# Altium PCB NEOS_CAN.PcbDoc
Units mil, origin at the board's own origin, x right, y up, seen from the top; angles counter-clockwise.
Board outline 3250 x 4000 mil, 2 copper layers (Top Layer, Bottom Layer); 41 components, 45 nets, 218 pads, 51 vias.
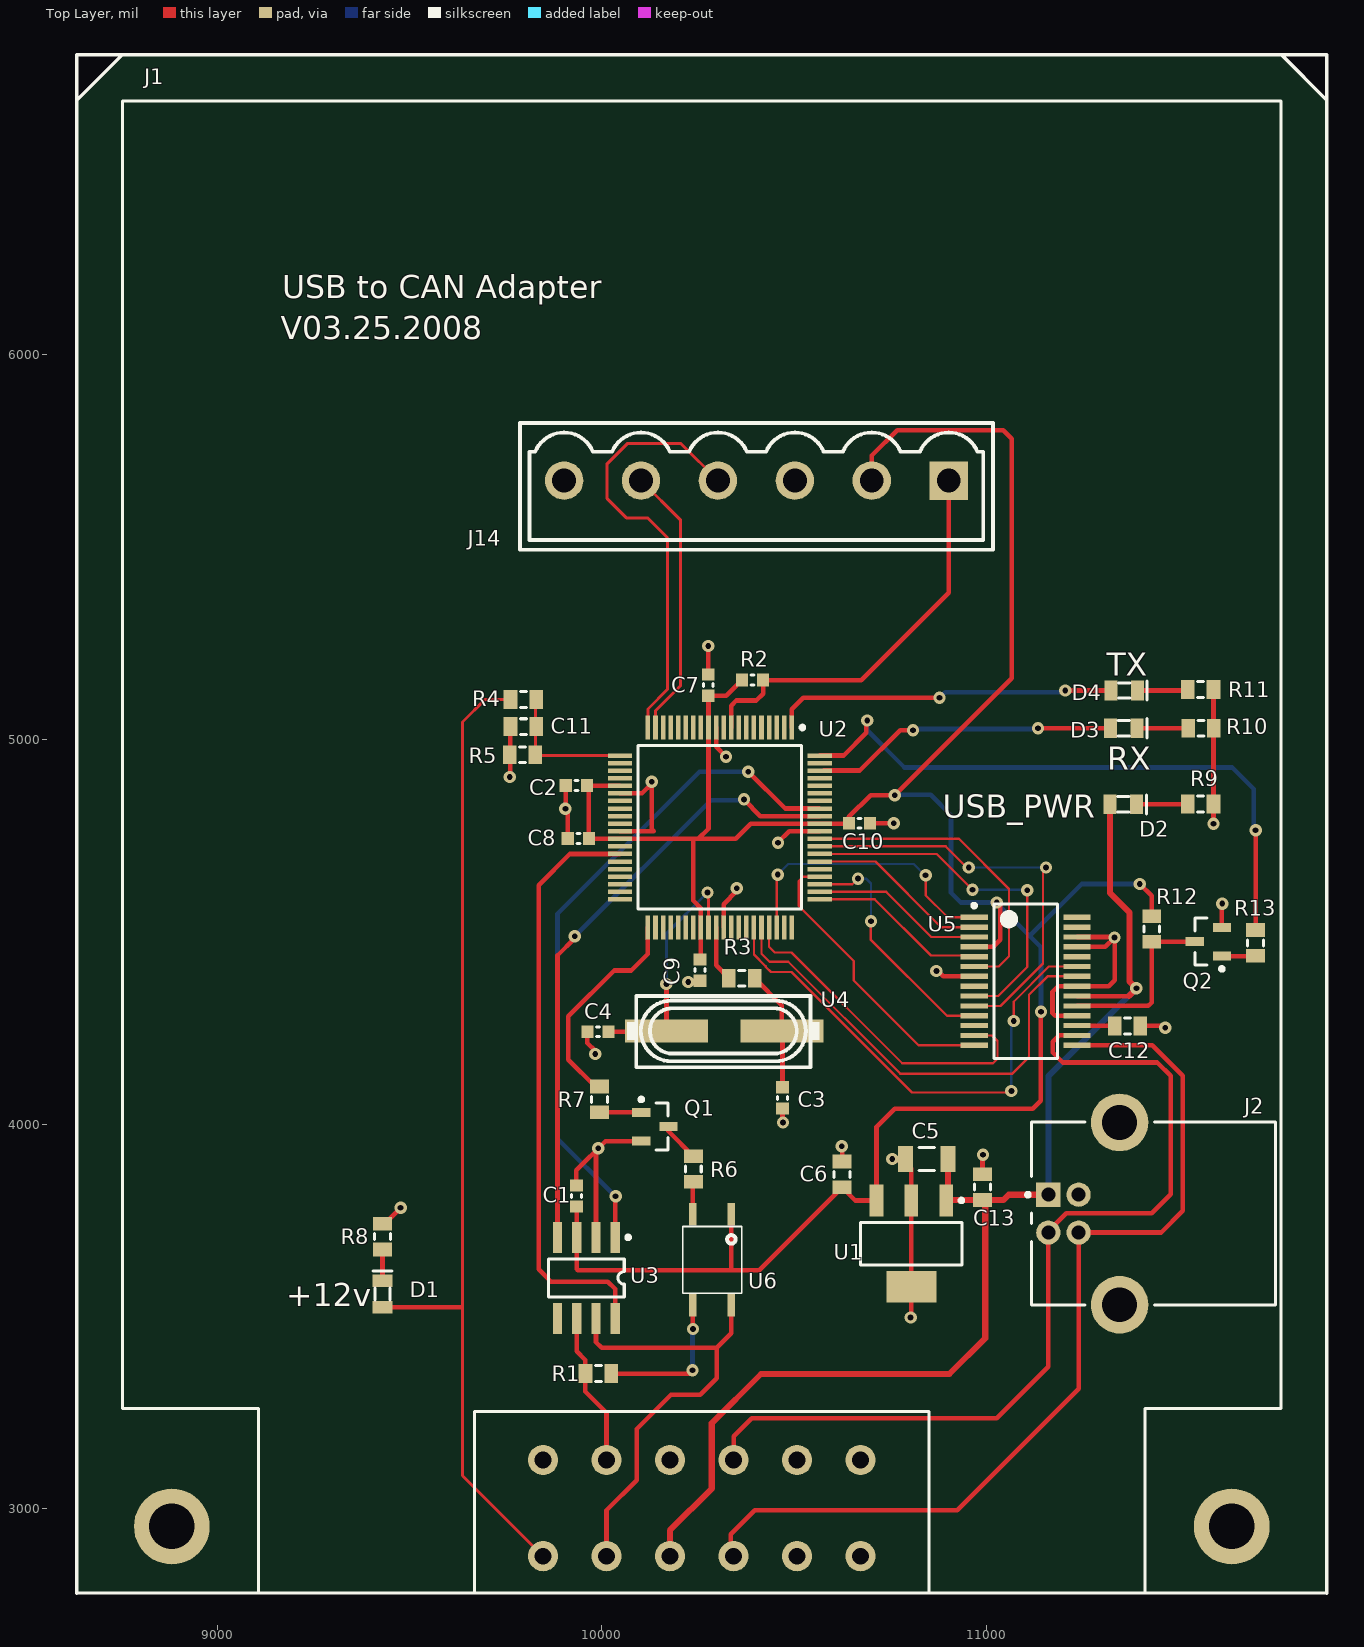
[diagram p0: Top Layer view]
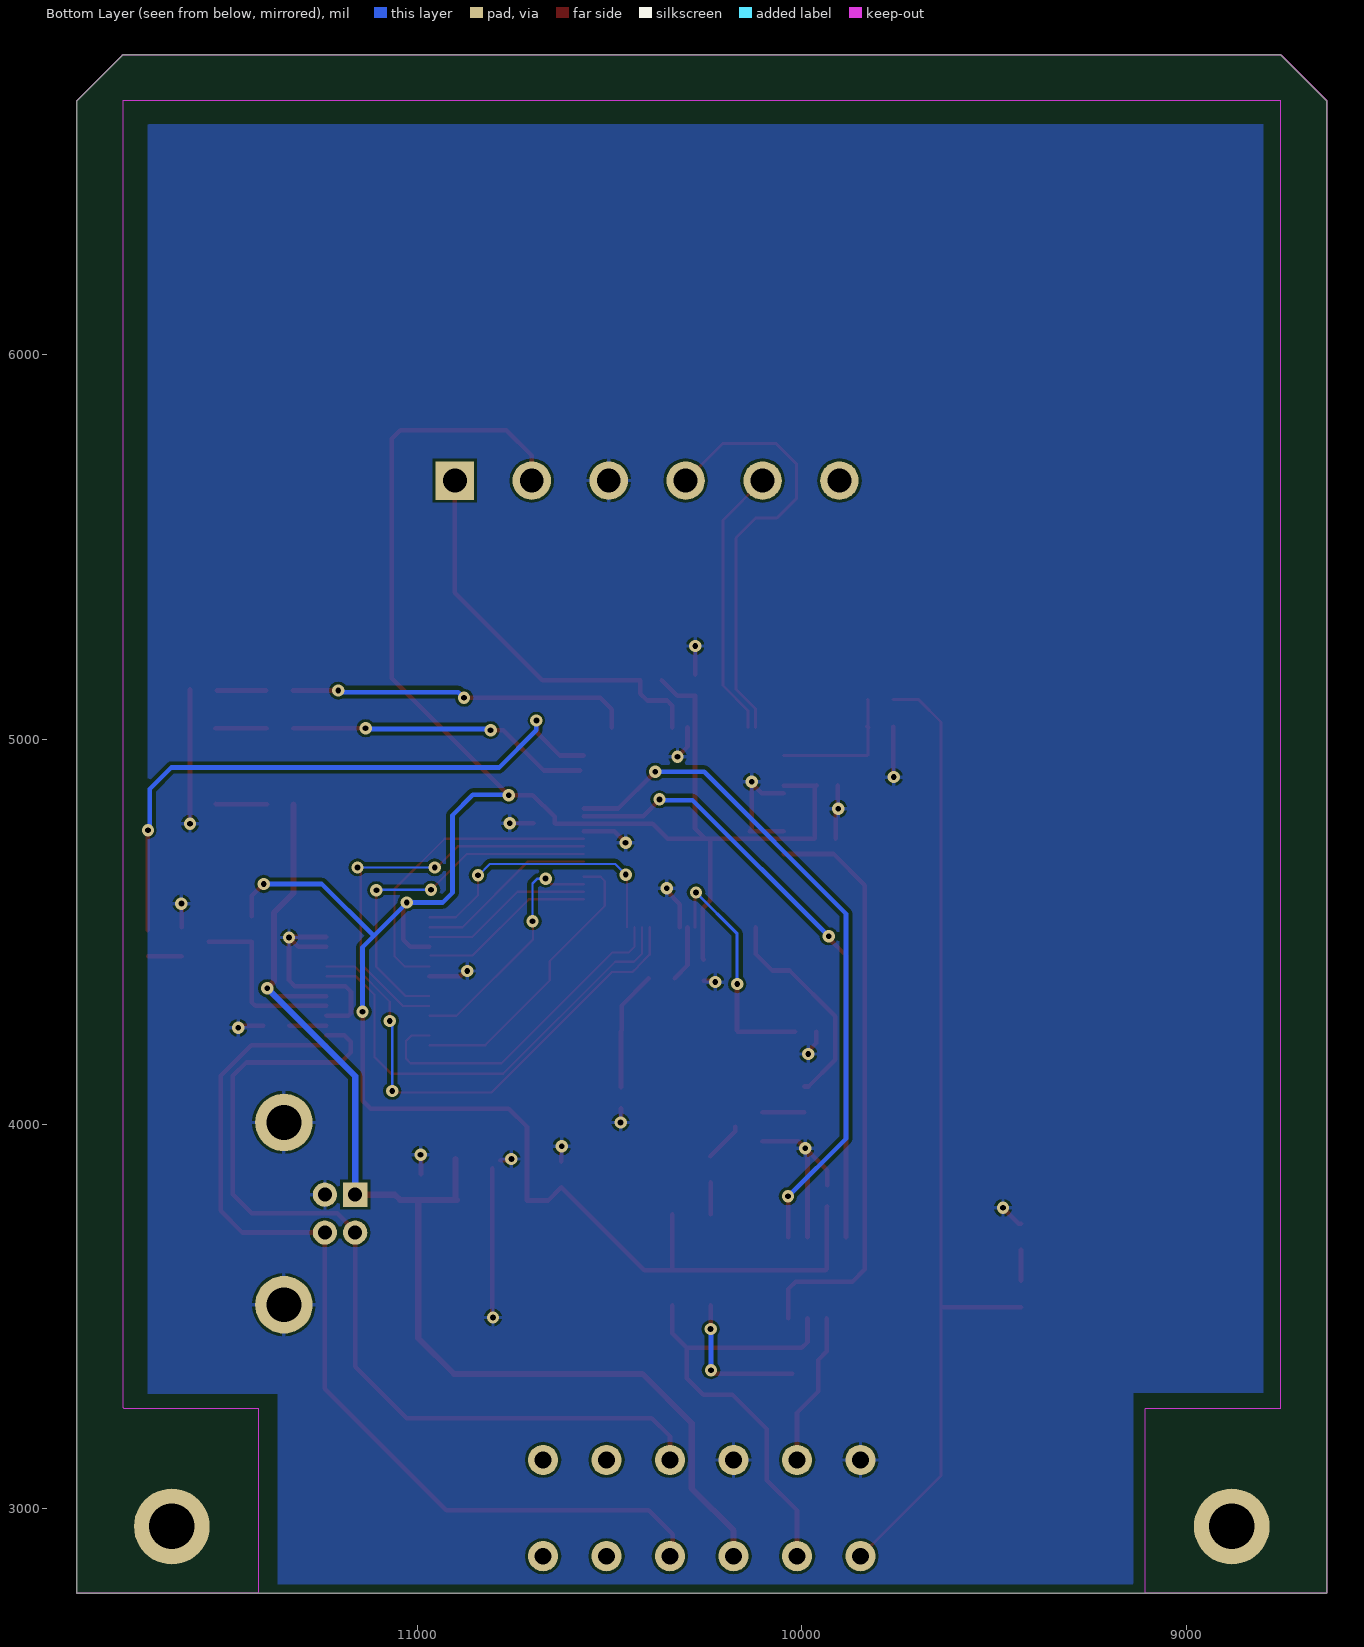
[diagram p1: Bottom Layer view, seen from below]

## Layer stack, top to bottom
Top Layer: signal copper 1.4
Dielectric: dielectric 12.6, FR-4, Dk 4.8
Bottom Layer: signal copper 1.4

## Board outline
8635,2780 8635,6660 8755,6780 11765,6780 11885,6660 11885,2780 8635,2780

## Design rules (kind name [scope] priority, off if disabled: settings)
Clearance Clearance_1 [(OnLayer('Bottom Layer') AND InNet('GND') AND InPolygon) vs (OnLayer('Bottom Layer'))] p1: gap=10
Clearance [All] p2: gap=7
ComponentClearance [All] p1: gap=-5000 collisioncheckmode=0 verticalgap=0
HoleSize [All] p1: absolutevalues=TRUE maxlimit=500 minlimit=1 maxpercent=80.000 minpercent=20.000
PolygonConnect [All] p1: connectstyle=Relief reliefconductorwidth=10 reliefentries=4 polygonreliefangle="90 Angle"
RoutingVias [All] p1: holewidth=15 width=32 viastyle="Through Hole" minholewidth=15 minwidth=32 maxholewidth=15 maxwidth=32
SolderMaskExpansion [All] p1: expansion=4
TestPointUsage [All] p1: valid=0 allowmultiple=FALSE
Testpoint [All] p1: side=15 testpointundercomponent=TRUE minsize=40 maxsize=100 preferedsize=60 minholesize=0 maxholesize=40 preferedholesize=32 testpointgrid=1 style=1023 order=0-112345678
Width POWER [(InNet('+3.3V') OR InNet('USB_VBUS'))] p1: maxlimit=20 minlimit=10 preferedwidth=16 toplayer_minwidth=12 bottomlayer_minwidth=12 minimp=50.000000 maximp=50.000000 favimp=50.000000
Width [All] p2: maxlimit=12 minlimit=6 preferedwidth=7
17 further rules are at their usual default settings.

## Components (designator, comment, footprint, x,y, rotation, side; value= is the part's Value field where it differs from the comment)
C1 "C" 0603 9934,3813 r270 top
C2 "C" 0603 9934,4880 r0 top
C3 "C" 0603 10470,4068 r90 top
C4 "C" 0603 9990,4240 r0 top
C5 "C" 1206 10845,3909 r0 top
C6 "C" 0805 10625,3869 r270 top
C7 "C" 0603 10277,5141 r270 top
C8 "C" 0603 9939,4742 r0 top
C9 "C" 0603 10255,4400 r90 top
C10 "C" 0603 10670,4782 r180 top
C11 "C" 0805 9796,5033 r0 top
C12 "C" 0805 11367,4255 r0 top
C13 "C" 0805 10990,3836 r270 top
D1 "LED_0805" LED_0805 9430,3558 r90 top
D2 "LED_0805" LED_0805 11356,4831 r0 top
D3 "LED_0805" LED_0805 11357,5029 r0 top
D4 "LED_0805" LED_0805 11358,5127 r0 top
J1 "DT13-12PA-R008" DTM13-12PA-R008 10260,2780 r0 top locked
J2 "CONN RCPT USB TYPE B R/A PCB" 1-1470156 11752,3767 r0 top
J14 "CONN HEADER VERT 6POS 5.08MM" JCPM5086VE0Z 10902,5673 r180 top
Q1 "NPN_SOT23" SOT95P245X145-3L 10138,3993 r0 top
Q2 "NPN_SOT23" SOT95P245X145-3L 11577,4474 r180 top
R1 "R" 0805 9991,3351 r180 top
R2 "R" 0603 10392,5154 r0 top
R3 "R" 0805 10364,4379 r0 top
R4 "R" 0805 9796,5104 r180 top
R5 "R" 0805 9794,4960 r0 top
R6 "R" 0805 10238,3883 r270 top
R7 "R" 0805 9994,4064 r90 top
R8 "R" 0805 9430,3707 r90 top
R9 "R" 0805 11557,4832 r180 top
R10 "R" 0805 11558,5029 r180 top
R11 "R" 0805 11557,5130 r180 top
R12 "R" 0805 11430,4507 r270 top
R13 "R" 0805 11700,4471 r90 top
U1 "LM2937" SOT223 10805,3689 r270 top
U2 "dsPIC30F6014A" TQFP-80 10307,4771 r270 top
U3 "SN65HVD230DR" "SOIC 8" 9960,3600 r180 top
U4 "CRYSTAL" HCM49 10318,4242 r0 top
U5 "FT245RL" SOP65P780X200-28L 11102,4371 r0 top
U6 "TLP172A" PS7241 10337,3765 r270 top

## Footprints (in the part's own frame and the unit in brackets; to place one, negate y for a bottom-side part, rotate by r counter-clockwise, add the part's x,y. Pads: shape width x height; smd on the part's side, far side on the other; paste and mask are expansions set on the pad)
1-1470156 [mm] "Connector; USB1.1, Type B, Thru-Hole; 4 Position; Right Angle"
  rect 1.6x1.6 hole 0.92: 1(-15.01,1.25)
  round 1.6 hole 0.92: 2(-15.01,-1.25) 3(-13.01,-1.25) 4(-13.01,1.25)
  round 3.8 hole 2.3: 5(-10.3,6.02) 6(-10.3,-6.02)
  silkscreen extent -16.48,-6.05 -0.02,6.05, body extent -17,-7.44 0,7.44, height 11
0603 [mm] "0603 Generic"
  rect 0.8x0.85 smd: 1(-0.7,0) 2(0.7,0)
  silkscreen extent -0.1,-0.33 0.1,0.33, body extent -0.85,-0.45 0.85,0.45, height 0.46
0805 [mm] "0805 Generic"
  rect 0.9x1.25 smd: 1(-0.85,0) 2(0.85,0)
  silkscreen extent -0.2,-0.53 0.2,0.53, body extent -1.05,-0.64 1.05,0.64, height 0.61
1206 [mm] "1206 Generic"
  rect 1x1.75 smd: 1(-1.4,0) 2(1.4,0)
  silkscreen extent -0.5,-0.77 0.5,0.77, body extent -1.65,-0.85 1.65,0.85, height 0.61
DTM13-12PA-R008 [mm] "Connector and PCB Dimensions 12 PIN DTM Assembly for EEC-325X4 enclosure"
  round 2 hole 1.1: 1(10.48,2.45) 2(6.29,2.45) 3(2.1,2.45) 4(-2.1,2.45) 5(-6.29,2.45) 6(-10.48,2.45) 7(-10.48,8.8) 8(-6.29,8.8) 9(-2.1,8.8) 10(2.1,8.8) 11(6.29,8.8) 12(10.48,8.8)
  round 5 hole 3: A(-35,4.41) B(35,4.41)
  Keep-Out Layer region: 29.275,0 41.275,0 41.275,98.575 38.275,101.575 38.275,101.6 -38.275,101.6 -41.275,98.6 -41.275,0.025 -41.25,0 -29.275,0 -29.275,12.175 -29.325,12.225 -38.25,12.225 -38.25,98.55 38.25,98.55 38.25,12.275 38.175,12.2 29.275,12.2
  silkscreen extent -41.27,0 41.27,101.6, body extent -54.72,-26.16 54.72,10.16, height 26.3
HCM49 [mm] "Surface Mount HCM49 Crystal"
  rect 5.5x1.5 smd: 1(-3.8,0) 2(3.82,0)
  silkscreen extent -6.4,-2.4 6.3,2.3, body extent -6.2,-2.53 6.2,2.3, height 4.25
JCPM5086VE0Z [mil] "ASI term strip header 6P 5.08mm Vert"
  rect 100x100 / inner round 100 / far side rect 100x100 hole 62: 1(0,0)
  round 100 hole 62: 2(200,0) 3(400,0) 4(600,0) 5(800,0) 6(1000,0)
  silkscreen extent -115,-150 1115,180, body extent -100,-150 1100,189, height 472
LED_0805 [mm] "LED_0805"
  rect 0.85x1.3 smd: A(-0.875,0) C(0.875,0)
  silkscreen extent -0.38,-0.63 1.52,0.64, body extent -1.05,-0.67 1.05,0.68, height 1.1
PS7241 [mm]
  rect 1.5x0.5 smd: 1(0,0) 2(0,-2.54) 3(6,-2.54) 4(6,0)
  silkscreen extent 0.8,-3.2 5.2,0.7, body extent 0.8,-3.2 5.2,0.7, height 2.05
"SOIC 8" [mm]
  rect 0.6x2.05 smd: 1(-1.905,-2.675) 2(-0.635,-2.675) 3(0.635,-2.675) 4(1.905,-2.675) 5(1.905,2.675) 6(0.635,2.675) 7(-0.635,2.675) 8(-1.905,2.675)
  silkscreen extent -2.88,-2.8 2.5,1.25, body extent -2.49,-3.19 2.51,3.14, height 1.88
SOP65P780X200-28L [mm] "SOP, 28-Leads, Body 10.2x5.3mm (max), Pitch 0.65mm, IPC High Density"
  rect 1.8x0.35 smd: 1(-3.4,4.225) 2(-3.4,3.575) 3(-3.4,2.925) 4(-3.4,2.275) 5(-3.4,1.625) 6(-3.4,0.975) 7(-3.4,0.325) 8(-3.4,-0.325) 9(-3.4,-0.975) 10(-3.4,-1.625) 11(-3.4,-2.275) 12(-3.4,-2.925) 13(-3.4,-3.575) 14(-3.4,-4.225) 15(3.4,-4.225) 16(3.4,-3.575) 17(3.4,-2.925) 18(3.4,-2.275) 19(3.4,-1.625) 20(3.4,-0.975) 21(3.4,-0.325) 22(3.4,0.325) 23(3.4,0.975) 24(3.4,1.625) 25(3.4,2.275) 26(3.4,2.925) 27(3.4,3.575) 28(3.4,4.225)
  silkscreen extent -3.52,-5.1 2.1,5.12, body extent -2.1,-5.1 2.1,5.1, height 2
SOT95P245X145-3L [mm] "SOT23, 3-Leads, Body 3.1x2.6mm (max), Pitch 0.95mm, IPC High Density"
  rect 1.2x0.6 smd: 1(-0.9,0.95) 2(-0.9,-0.95) 3(0.9,0)
  silkscreen extent -1.02,-1.55 0.87,1.92, body extent -1.19,-1.45 1.29,1.47, height 1.05
SOT223 [mm] "SOT223, 4-Leads, Body 6.7x7.3mm (max), Pitch 2.30mm, IPC High Density"
  rect 2.1x0.9 smd: 1(-2.85,2.3) 2(-2.85,0) 3(-2.85,-2.3)
  rect 2.1x3.3 smd: 4(2.85,0)
  silkscreen extent -2.97,-3.35 1.4,3.43, body extent -3.54,-3.35 3.76,3.35, height 1.75
TQFP-80 [mm]
  rect 1.6x0.3 smd: 1(-6.6,4.75) 2(-6.6,4.25) 3(-6.6,3.75) 4(-6.6,3.25) 5(-6.6,2.75) 6(-6.6,2.25) 7(-6.6,1.75) 8(-6.6,1.25) 9(-6.6,0.75) 10(-6.6,0.25) 11(-6.6,-0.25) 12(-6.6,-0.75) 13(-6.6,-1.25) 14(-6.6,-1.75) 15(-6.6,-2.25) 16(-6.6,-2.75) 17(-6.6,-3.25) 18(-6.6,-3.75) 19(-6.6,-4.25) 20(-6.6,-4.75) 41(6.6,-4.75) 42(6.6,-4.25) 43(6.6,-3.75) 44(6.6,-3.25) 45(6.6,-2.75) 46(6.6,-2.25) 47(6.6,-1.75) 48(6.6,-1.25) 49(6.6,-0.75) 50(6.6,-0.25) 51(6.6,0.25) 52(6.6,0.75) 53(6.6,1.25) 54(6.6,1.75) 55(6.6,2.25) 56(6.6,2.75) 57(6.6,3.25) 58(6.6,3.75) 59(6.6,4.25) 60(6.6,4.75)
  rect 0.3x1.6 smd: 21(-4.75,-6.6) 22(-4.25,-6.6) 23(-3.75,-6.6) 24(-3.25,-6.6) 25(-2.75,-6.6) 26(-2.25,-6.6) 27(-1.75,-6.6) 28(-1.25,-6.6) 29(-0.75,-6.6) 30(-0.25,-6.6) 31(0.25,-6.6) 32(0.75,-6.6) 33(1.25,-6.6) 34(1.75,-6.6) 35(2.25,-6.6) 36(2.75,-6.6) 37(3.25,-6.6) 38(3.75,-6.6) 39(4.25,-6.6) 40(4.75,-6.6) 61(4.75,6.6) 62(4.25,6.6) 63(3.75,6.6) 64(3.25,6.6) 65(2.75,6.6) 66(2.25,6.6) 67(1.75,6.6) 68(1.25,6.6) 69(0.75,6.6) 70(0.25,6.6) 71(-0.25,6.6) 72(-0.75,6.6) 73(-1.25,6.6) 74(-1.75,6.6) 75(-2.25,6.6) 76(-2.75,6.6) 77(-3.25,6.6) 78(-3.75,6.6) 79(-4.25,6.6) 80(-4.75,6.6)
  silkscreen extent -6.72,-5.4 5.4,5.58

## Part data
C1 C2 C3 C4 C5 C6 C7 C8 C9 C10 C11 C12 C13: "Generic C"
D1 D2 D3 D4: "DT13-2P"
J1: "DTM13-12PA-R008"
J2: library part USB_TYPEB
J14: library part JCPM5086VE0Z, "ASI Vert Term Strip Header 3 Pos 5.08mm"
R1 R2 R3 R4 R5 R6 R7 R8 R9 R10 R11 R12 R13: "Generic R"
U1: "IC REG LDO 500MA 3.3V SOT-223"
U2: library part IS/DSPIC30F501320IPTZ_1, "Microchip dsPIC30F5013 80-TQFP"
U3: library part IS/SN65HVD230DRT, "CAN Transceiver 3.3V w/standby"
U5: "USB Interface ICs USB TO PARALLEL FIFO 28 PIN SSOP"
U6: "PHOTOCOUPLER PHOTORELAY 4-SOP"

## Via types
v1: diameter 32, hole 15, Top Layer to Bottom Layer, 51 vias

## Nets (pads, with @x,y where several pads share a name; then routed paths per layer and width w, separated by ;. In a path a pad name is that pad's centre, name@x,y a point inside that pad or via, vN(x,y) a via of type N, cw(c..) or ccw(c..) an arc to the next point about the centre after c; other vN are vias at no path point)
+3.3V: C1.2 C2.2 C6.2 C7.2 C8.2 C9.2 C10.2 J14.2 R2.1 R12.1 U1.3 U2.12 U2.25 U2.32 U2.48 U2.71 U3.3 U5.4 U6.1 | length 6919.8
  Top Layer w12: C1.2 9935,3784.44 9935,3623 9938,3620 10409.46,3620 C6.2 10659.33,3801.2 U1.3 10714.45,3992.45 10762,4040 11121,4040 11141,4060 v1@11141,4291 ; C2.2 9966.56,4875 C8.2 9967.09,4741.47 10348.47,4741.47 10387.84,4780.84 10641.28,4780.84 C10.2 10642.44,4798.44 10699,4855 v1(10762,4855) 11066,5159 11066,5782 11044,5804 10768,5804 10702,5738 J14.2 ; C2.2@9962.29,4879.27 U2.25 ; 10238,4740.47 10238,4581 10257.79,4561.21 10257.79,4430.35 C9.2 ; 10251,4741.47 10277.47,4767.94 C7.2@10277.47,5112.97 ; C7.2 10323.88,5113.44 R2.1 ; 10337,3620 U6.1 ; U5.4 11017.57,4460.57 11036,4479 11036,4567 v1(11027,4576) ; v1(11399,4624) 11430,4593 R12.1
  Bottom Layer w12: v1(10762,4855) 10763,4856 10855,4856 10908,4803 10908,4601 10933,4576 v1(11027,4576) ; v1@11026,4576 11142,4460 v1(11142,4292) ; 11112.84,4489.16 11247.68,4624 v1(11399,4624)
CAN_+12V: D1.A J1.6 R4.2 | length 2610.7
  Top Layer w8: R4.2 9697,5104 9638,5045 9638,3085.86 J1.6
  Top Layer w12: D1.A 9636.45,3523.55
GND: C1.1 C2.1 C3.1 C4.1 C5.1 C6.1 C7.1 C8.1 C9.1 C10.1 C11.1 C12.2 C13.1 J1.7 J1.9 J2.4 J2.5 J2.6 J14.3 Q1.2 Q2.2 R5.1 R8.2 R9.1 R10.1 R11.1 U1.2 U1.4 U2.11 U2.26 U2.31 U2.51 U2.70 U3.2 U5.7 U5.18 U5.21 U5.25 U5.26 | length 3427.3
  Top Layer w12: R8.2 9435.46,3740.46 v1(9477,3782) ; v1(9761,4902) 9762,4903 9762,4961.46 9762.54,4962 C11.1 ; v1(9905.44,4819.44) v1@9906.44,4819.44 ; C2.1 v1@9906.44,4819.44 ; C8.1 9911.44,4814.44 v1@9906.44,4819.44 ; C1.1 9934,3880 10009.6,3955.6 Q1.2 ; C4.1 9962.44,4210.56 9983,4190 v1(9983,4182) ; U3.2 9985,3928 9994,3937 v1(9991,3937) ; U2.31 10135.16,4761.16 10130,4766.32 v1(10130,4890) ; U2.26 10104.58,4859.58 v1@10130,4885 ; v1(10225,4369) 10228.44,4372.44 C9.1 ; C7.1 v1(10277,5243) ; U2.11 10297.16,4980.84 v1(10323,4955) ; U2.51 10316.84,4571.84 10351,4606 v1(10351,4613) ; v1(10458,4731) 10458,4732 10487.16,4761.16 U2.70 ; C3.1 10470,4005 v1(10471,4004) ; v1(10624,3942) 10625,3941 C6.1 ; C10.1 v1(10759,4782) ; v1(10755,3909) 10758,3906 C5.1@10784,3906 ; v1(10803,3497) 10805,3499 C5.1@10805,3885 ; v1(10870,4398) 10874,4398 10888.2,4383.8 U5.7 ; C13.1 10990,3919 v1(10991,3920) ; U5.18 11178.57,4281.43 11172,4288 11172,4344 11186.2,4358.2 11318.2,4358.2 11333.32,4373.31 v1(11333.32,4485) ; U5.25 11308.88,4460.57 v1(11333.32,4485) ; U5.26 11332.16,4486.16 v1(11333.32,4485) ; C12.2 11460,4255 v1(11465,4250) ; v1(11590.46,4780.54) R11.1 ; Q2.2 11612.43,4572.43 v1(11613,4573)
NetC3_2: C3.2 R3.2 U4.2 | length 311.2
  Top Layer w12: R3.2 10468.39,4308.07 U4.2 ; C3.2 U4.2@10470,4240.39
NetC4_2: C4.2 U2.49 U4.1 | length 645.2
  Top Layer w8: v1(10168,4363.79) v1@10168.39,4363.39 ; v1(10275,4602) 10277.47,4599.53 U2.49
  Top Layer w12: C4.2 U4.1@10166.39,4240 ; U4.1 v1@10168.39,4363.39
  Bottom Layer w8: v1(10168,4363.79) 10168,4495 v1(10275,4602)
NetC11_2: C11.2 R4.1 R5.2 U2.21 | length 368.2
  Top Layer w8: R4.1 9827.46,5102 R5.2 9829.46,4958.01 U2.21
  Top Layer w12: C11.2@9827.46,5031 C11.2
NetC12_1: C12.1 U5.17 | length 96.8
  Top Layer w12: U5.17 C12.1@11332.69,4255.84
NetD1_C: D1.C R8.1 | length 81.1
  Top Layer w12: D1.C R8.1
NetD2_C: D2.C R9.2 | length 133.5
  Top Layer w12: D2.C 11522.54,4831 R9.2
NetD3_A: D3.A U2.78 | length 792.1
  Top Layer w12: U2.78@10576,4919 10671,4919 10776,5024 v1(10809,5024) ; v1(11134,5029) D3.A
  Bottom Layer w12: v1(10809,5024) 10812,5027 11132,5027 v1(11134,5029)
NetD3_C: D3.C R10.2 | length 133.1
  Top Layer w12: D3.C R10.2
NetD4_A: D4.A U2.1 | length 897
  Top Layer w12: U2.1 10494.01,5078.01 10524,5108 v1(10878,5108) ; v1(11205,5127) D4.A
  Bottom Layer w12: v1(10878,5108) 10893,5123 11201,5123 v1(11205,5127)
NetD4_C: D4.C R11.2 | length 128.1
  Top Layer w12: D4.C R11.2@11520.54,5127
NetJ1_5: J1.5 U3.7 U6.4 | length 1213.2
  Top Layer w12: U3.7 9985,3433 10000,3418 10299,3418 ; J1.5 10012.36,2995.36 10091,3074 10091,3207 10180,3296 10256,3296 10299,3339 10299,3418 ; U6.4 10337,3456 10299,3418
NetJ1_8: J1.8 R1.2 U3.6 | length 400.3
  Top Layer w12: U3.6 9935,3409 9957.54,3386.46 9957.54,3304.46 10012.36,3249.64 J1.8
NetJ14_1: J14.1 R2.2 U2.9 | length 1056.5
  Top Layer w12: U2.9 10336.53,5087.53 10350,5101 10402,5101 10419.56,5118.56 R2.2 10675,5154 10902,5381 J14.1
NetJ14_4: J14.4 U2.20 | length 1153.8
  Top Layer w8: U2.20 10119.99,5078.99 10171,5130 10171,5524 10119,5576 10064,5576 10014,5626 10014,5717 10066,5769 10206,5769 J14.4
NetJ14_5: J14.5 U2.19 | length 711.9
  Top Layer w8: J14.5 10205,5570 10205,5140 10139.68,5074.68 U2.19
NetQ1_1: Q1.1 R7.1 | length 108.4
  Top Layer w12: R7.1 Q1.1@10102.43,4030.54
NetQ1_3: Q1.3 R6.1 | length 103.3
  Top Layer w12: Q1.3 10173.43,3981.03 R6.1
NetQ2_1: Q2.1 R13.1 | length 86.6
  Top Layer w12: Q2.1 R13.1@11699.06,4436.6
NetQ2_3: Q2.3 R12.2 U5.19 | length 467.2
  Top Layer w12: U5.19 11421.02,4307.02 11430,4316 R12.2 11430.46,4474 Q2.3
NetR1_1: R1.1 U6.3 | length 384.5
  Top Layer w12: R1.1 10227,3351 v1(10236,3360) ; v1(10237,3467) U6.3
  Bottom Layer w12: v1(10236,3360) 10236,3466 v1(10237,3467)
NetR3_1: R3.1 U2.50 | length 146
  Top Layer w12: U2.50 10297.16,4412.38 R3.1
NetR6_2: R6.2 U6.2 | length 83.5
  Top Layer w12: U6.2 R6.2@10237,3848.54
NetU2_34: U2.34 U3.8 | length 1540.2
  Top Layer w12: U3.8 10035,3571 10016,3590 9868,3590 9836,3622 9836,4621 9917.1,4702.1 U2.34
NetU2_55: U2.55 U5.23 | length 1328.1
  Top Layer w6: U2.55 10395.58,4440.42 10426,4410 10426,4409 10440,4395 10493.62,4395 10806.62,4082 11061,4082 v1(11065,4086) ; v1(11071,4268) 11071,4318 11162.39,4409.39 U5.23
  Bottom Layer w6: v1(11065,4086) 11065,4262 v1(11071,4268)
NetU2_56: U2.56 U5.22 | length 1217.7
  Top Layer w6: U2.56 10415.27,4442.73 10436,4422 10485,4422 10776,4131 11068,4131 11111,4174 11111,4336 11158.8,4383.8 U5.22
NetU2_57: U2.57 U5.13 | length 887.4
  Top Layer w6: U2.57 10434.95,4461.05 10450,4446 10493,4446 10781,4158 11017,4158 11029,4170 11029,4216 11014.75,4230.25 U5.13
NetU2_58: U2.58 U5.1 | length 750.1
  Top Layer w6: U2.58 10454.64,4648.36 v1(10457.36,4648.36) ; v1(10842,4647) 10842,4595 10899.66,4537.34 U5.1
  Bottom Layer w6: v1(10457.36,4648.36) 10485,4676 10811,4676 10840,4647 v1(10842,4647)
NetU2_61: U2.61 U5.5 | length 458.6
  Top Layer w6: U2.61 10710.01,4583.99 10856,4438 U5.5@10965,4438
NetU2_62: U2.62 U5.3 | length 450
  Top Layer w6: U2.62 10739.32,4603.68 10856.84,4486.16 U5.3
NetU2_63: U2.63 U5.11 | length 641.4
  Top Layer w6: U2.63 10651.36,4623.36 v1(10666,4638) ; v1(10700,4527) 10699,4526 10699,4480 10897.57,4281.43 U5.11
  Bottom Layer w6: v1(10666,4638) 10687,4638 10700,4625 v1(10700,4527)
NetU2_64: U2.64 U5.14 | length 760.5
  Top Layer w6: U2.64 10523.05,4643.05 10512,4632 10512,4567 10655,4424 10655,4373 10823.34,4204.66 U5.14
NetU2_66: U2.66 U5.2 | length 472
  Top Layer w6: U2.66 10711.58,4682.42 10882.25,4511.75 U5.2
NetU2_67: U2.67 U5.9 | length 949.2
  Top Layer w6: U2.67 10870.9,4702.1 v1(10964,4609) ; U5.9 11030.61,4332.61 11106,4408 v1(11106,4608)
  Bottom Layer w6: v1(10964,4609) 11107,4609 v1(11106,4608)
NetU2_68: U2.68 U5.10 | length 1088.6
  Top Layer w6: U2.68 10894.21,4721.79 10942,4674 10947,4674 v1(10954,4667) ; U5.10 11037.02,4307.02 11147,4417 11147,4659 v1(11155,4667)
  Bottom Layer w6: v1(10954,4667) v1(11155,4667)
NetU2_69: U2.69 U5.6 | length 823.1
  Top Layer w6: U2.69 10928.53,4741.47 11059,4611 11059,4436 11032.39,4409.39 U5.6
NetU2_72: U2.72 U3.4 | length 1604.2
  Top Layer w12: U3.4 9885,4438 9930,4483 v1(9930,4488) ; v1(10370,4844) 10370,4843 10412.47,4800.53 U2.72
  Bottom Layer w12: v1(9930,4488) 10284,4842 10368,4842 v1(10370,4844)
NetU2_73: U2.73 U3.1 | length 1779.6
  Top Layer w12: U3.1 10035,3811 v1(10036,3812) ; v1(10381,4916) 10476.79,4820.21 U2.73
  Bottom Layer w12: v1(10036,3812) 10035,3812 9885,3962 9885,4547 10254,4916 v1(10381,4916)
TERM_CTRL: R7.2 U2.41 | length 566.1
  Top Layer w12: R7.2 9982.54,4097.46 9913,4167 9913,4280 10032,4399 10077,4399 10119.99,4441.99 U2.41
USB_RESET: R13.2 U2.80 | length 1640.4
  Top Layer w12: U2.80 10629.01,4958.01 10688,5017 10688,5047 v1(10690,5049) ; R13.2 v1(11700,4764)
  Bottom Layer w12: v1(10690,5049) 10690,5024 10787,4927 11639,4927 11695,4871 11695,4769 v1(11700,4764)
USB_VBUS: C5.2 C13.2 D2.A J1.4 J2.1 U1.1 U5.20 | length 3233.3
  Top Layer w12: U5.20 11370.61,4332.61
  Top Layer w16: J1.4 10177.32,2943.32 10286,3052 10286,3222 10414,3350 10904,3350 10997,3443 10997,3795.54 C13.2 ; C5.2 10900.12,3805.77 10896.88,3802.54 11044.54,3802.54 11058.21,3816.21 J2.1 ; D2.A 11321.55,4600.45 11372,4550 11372,4371 v1(11390,4353) ; 11370.61,4332.61 v1@11390,4352
  Bottom Layer w16: J2.1 11161.06,4124.06 v1(11390,4353)
USBDM: J1.10 J2.2 U5.16 | length 2401.3
  Top Layer w12: J1.10 10342.68,3187.68 10390,3235 11027,3235 11161.06,3369.06 11161.06,3721.06 11208,3768 11430,3768 11479,3817 11479,4125 11444,4160 11199,4160 11173,4186 11173,4214 11189.25,4230.25 U5.16
USBDP: J1.3 J2.3 U5.15 | length 2474.3
  Top Layer w12: J1.3@10335,2880 10335,2933 10398,2996 10924,2996 11239.8,3311.8 J2.3 11454.79,3717.79 11511,3774 11511,4125 11431.34,4204.66 U5.15
pads on no net: J1.1 J1.2 J1.11 J1.12 J1.A J1.B J14.6 U2.2 U2.3 U2.4 U2.5 U2.6 U2.7 U2.8 U2.10 U2.13 U2.14 U2.15 U2.16 U2.17 U2.18 U2.22 U2.23 U2.24 U2.27 U2.28 U2.29 U2.30 U2.33 U2.35 U2.36 U2.37 U2.38 U2.39 U2.40 U2.42 U2.43 U2.44 U2.45 U2.46 U2.47 U2.52 U2.53 U2.54 U2.59 U2.60 U2.65 U2.74 U2.75 U2.76 U2.77 U2.79 U3.5 U5.8 U5.12 U5.24 U5.27 U5.28

## Polygon pours and split planes (outlines as drawn)
GND on Bottom Layer "Top Layer-No Net" (solid, remove dead copper, pour order 1000): 9130,2799 9138,2807 9138,3301 8800,3301 8798,3299 8800,3301 8800,6600 11698,6600 11700,6598 11700,3299 11364,3299 11362,3297 11362,2803 9133,2803 9130,2800 9131,2800

## Silkscreen, mask and mechanical layers (free items; w line width, h text height)
Top Overlay:
  lines w7.87: 8635,2781 11884,2781 11885,2780
  lines w10: 8635,2780 8635,6780 11885,6780 11885,2780
  text "USB to CAN Adapter" at 9169,6147 h60
  text "V03.25.2008" at 9165,6041 h60
  text "TX" at 11313,5166 h60
  text "RX" at 11314,4921 h60
  text "USB_PWR" at 10886,4796 h60
  text "+12v" at 9179,3526 h60

## Text inside footprints (layer, text, board x,y; h text height)
J2: Mechanical 1 "PCB Edge" at 11739.2,3544.5 h9.84 r90